# EAGLE board RC2014 Real-Time Clock and IO (EAGLE 7.1.0)
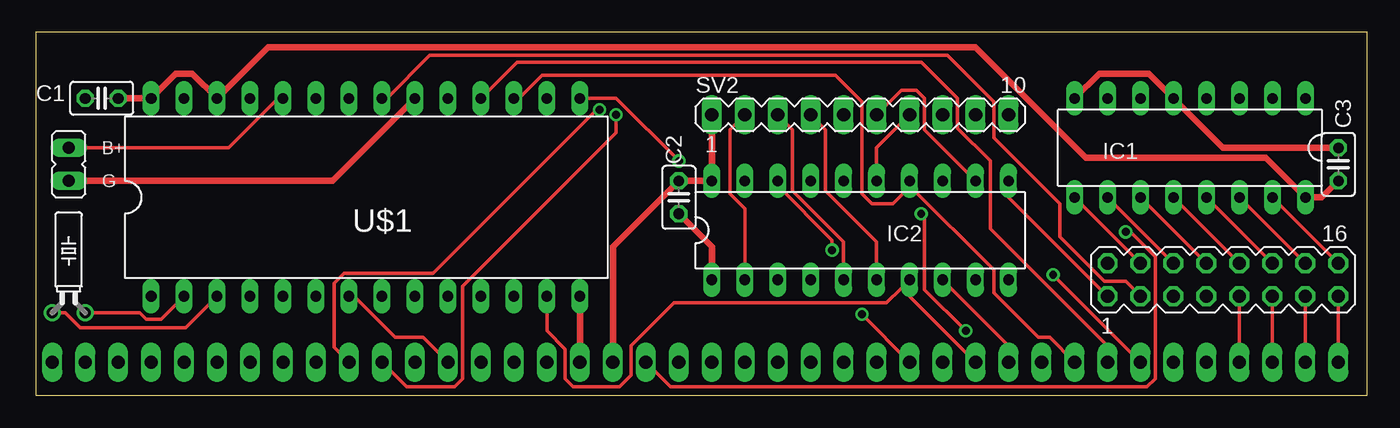
[diagram p0: board, top side]
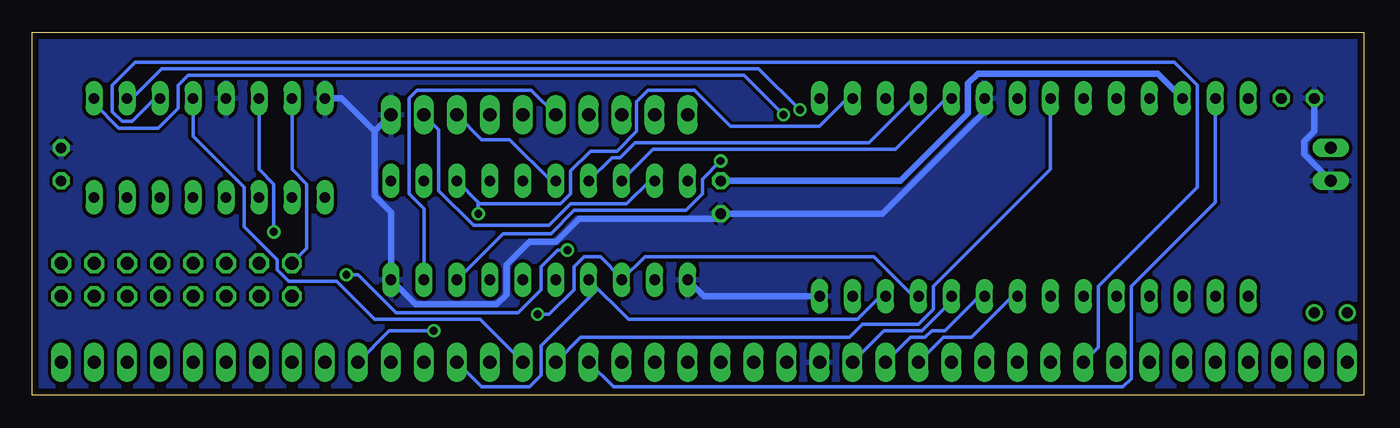
[diagram p1: board, bottom side, seen from below]

Size 102.54 x 27.93 mm. Coordinates in mm from the lower left corner, seen from the top.
Outline: 0,0 102.54,0 102.54,27.93 0,27.93 0,0
Copper layers (1*16): Top 0.035mm / dielectric 1.5mm / Bottom 0.035mm
Design rules "default *": minimum track width 10mil, minimum drill 24mil, track to track 10mil, track to pad 10mil, pad to pad 10mil, via to via 10mil, smd to smd 10mil, copper to edge 20mil, drill to drill 8mil, minimum pad ring 10mil, minimum via ring 8mil, stop-mask expansion 4mil, vias tented up to drill 25mil, thermal gap 10mil
Net classes: 1 PWR: width 0.508 mm

## Footprints (pad centres in the part's own frame; a part is rotated, then mirrored left to right if it is on the bottom)
C025-025X050 = drill 0.813 octagon: 1 -1.27,0; 2 1.27,0
DIL16 = drill 0.813 long: 1 -8.89,-3.81; 2 -6.35,-3.81; 3 -3.81,-3.81; 4 -1.27,-3.81; 5 1.27,-3.81; 6 3.81,-3.81; 7 6.35,-3.81; 8 8.89,-3.81; 9 8.89,3.81; 10 6.35,3.81; 11 3.81,3.81; 12 1.27,3.81; 13 -1.27,3.81; 14 -3.81,3.81; 15 -6.35,3.81; 16 -8.89,3.81
DIL20 = drill 0.813 long: 1 -11.43,-3.81; 2 -8.89,-3.81; 3 -6.35,-3.81; 4 -3.81,-3.81; 5 -1.27,-3.81; 6 1.27,-3.81; 7 3.81,-3.81; 8 6.35,-3.81; 9 8.89,-3.81; 10 11.43,-3.81; 11 11.43,3.81; 12 8.89,3.81; 13 6.35,3.81; 14 3.81,3.81; 15 1.27,3.81; 16 -1.27,3.81; 17 -3.81,3.81; 18 -6.35,3.81; 19 -8.89,3.81; 20 -11.43,3.81
JP1 = drill 0.914 long: 1 0,-1.27; 2 0,1.27
TC26H = drill 0.813: 1 -1.27,0; 2 1.27,0
MA08-2 = drill 1.016 octagon: 1 -8.89,-1.27; 2 -8.89,1.27; 3 -6.35,-1.27; 4 -6.35,1.27; 5 -3.81,-1.27; 6 -3.81,1.27; 7 -1.27,-1.27; 8 -1.27,1.27; 9 1.27,-1.27; 10 1.27,1.27; 11 3.81,-1.27; 12 3.81,1.27; 13 6.35,-1.27; 14 6.35,1.27; 15 8.89,-1.27; 16 8.89,1.27
MA10-1 = drill 1.016 long: 1 -11.43,0; 2 -8.89,0; 3 -6.35,0; 4 -3.81,0; 5 -1.27,0; 6 1.27,0; 7 3.81,0; 8 6.35,0; 9 8.89,0; 10 11.43,0
DIL28-6 = drill 0.813 long: 1 -16.51,-7.62; 2 -13.97,-7.62; 3 -11.43,-7.62; 4 -8.89,-7.62; 5 -6.35,-7.62; 6 -3.81,-7.62; 7 -1.27,-7.62; 8 1.27,-7.62; 9 3.81,-7.62; 10 6.35,-7.62; 11 8.89,-7.62; 12 11.43,-7.62; 13 13.97,-7.62; 14 16.51,-7.62; 15 16.51,7.62; 16 13.97,7.62; 17 11.43,7.62; 18 8.89,7.62; 19 6.35,7.62; 20 3.81,7.62; 21 1.27,7.62; 22 -1.27,7.62; 23 -3.81,7.62; 24 -6.35,7.62; 25 -8.89,7.62; 26 -11.43,7.62; 27 -13.97,7.62; 28 -16.51,7.62
SIP40 = drill 1.016 long: 1 -48.26,0; 2 -45.72,0; 3 -43.18,0; 4 -40.64,0; 5 -38.1,0; 6 -35.56,0; 7 -33.02,0; 8 -30.48,0; 9 -27.94,0; 10 -25.4,0; 11 -22.86,0; 12 -20.32,0; 13 -17.78,0; 14 -15.24,0; 15 -12.7,0; 16 -10.16,0; 17 -7.62,0; 18 -5.08,0; 19 -2.54,0; 20 0,0; 21 2.54,0; 22 5.08,0; 23 7.62,0; 24 10.16,0; 25 12.7,0; 26 15.24,0; 27 17.78,0; 28 20.32,0; 29 22.86,0; 30 25.4,0; 31 27.94,0; 32 30.48,0; 33 33.02,0; 34 35.56,0; 35 38.1,0; 36 40.64,0; 37 43.18,0; 38 45.72,0; 39 48.26,0; 40 50.8,0

## Placement (x,y rotation side)
C1  [C025-025X050]  5.08,22.86 180 top
C2  [C025-025X050]  49.53,15.24 270 top
C3  [C025-025X050]  100.33,17.78 90 top
IC1  74HC138N  [DIL16]  88.9,19.05 180 top
IC2  74LS374N  [DIL20]  63.5,12.7 0 top
JP1  [JP1]  2.54,17.78 180 top
Q1  [TC26H]  2.54,6.35 0 top
SV1  [MA08-2]  91.44,8.89 0 top
SV2  [MA10-1]  63.5,21.59 0 top
U$1  BQ4845  [DIL28-6]  25.4,15.24 0 top
U$2  RC2014  [SIP40]  49.53,2.54 0 top

## Library data of the parts
C1-C3 = resistor
IC1 IC2 = 74xx-eu
JP1 = jumper
Q1 = crystal; OC_FARNELL: unknown; OC_NEWARK: unknown
SV1 SV2 = con-lstb; OC_FARNELL: unknown; OC_NEWARK: unknown
U$1 U$2 = scott

## Nets
+5V [PWR]: C1.1 C2.1 C3.1 IC1.16 IC2.20 SV2.1 U$1.26 U$1.28 U$2.18
A5: IC1.1 U$2.11
A6: IC1.2 U$2.10
A7: IC1.3 U$2.9
D0: IC2.3 U$1.11 U$2.27
D1: IC2.4 U$1.12 U$2.28
D2: IC2.7 U$1.13 U$2.29
D3: IC2.8 U$1.15 U$2.30
D4: IC2.13 U$1.16 U$2.31
D5: IC2.14 U$1.17 U$2.32
D6: IC2.17 U$1.18 U$2.33
D7: IC2.18 U$1.19 U$2.34
GND [PWR]: C1.2 C2.2 C3.2 IC1.5 IC1.8 IC2.1 IC2.10 JP1.2 SV2.10 U$1.14 U$1.20 U$2.17
N$1: IC2.2 SV2.2
N$2: IC2.5 SV2.3
N$3: IC2.6 SV2.4
N$4: IC2.9 SV2.5
N$5: IC2.12 SV2.6
N$6: IC2.15 SV2.7
N$7: IC2.16 SV2.8
N$8: IC2.19 SV2.9
N$9: SV1.9 U$2.37
N$10: JP1.1 U$1.24
N$11: SV1.11 U$2.38
N$12: SV1.13 U$2.39
N$13: U$1.10 U$2.16
N$14: U$1.9 U$2.15
N$15: U$1.8 U$2.14
N$16: U$1.7 U$2.13
N$17: U$1.27 U$2.24
N$18: U$1.22 U$2.25
N$19: IC1.4 U$2.26
N$20: SV1.15 U$2.40
N$21: SV1.3 U$1.21
N$22: IC1.15 SV1.16
N$23: IC1.14 SV1.14
N$24: IC1.13 SV1.12
N$25: IC1.12 SV1.10
N$26: IC1.11 SV1.8
N$27: IC1.10 SV1.6
N$28: IC1.9 SV1.4
N$29: IC1.7 SV1.2
N$30: Q1.2 U$1.2
N$31: Q1.1 U$1.3
N$32: IC2.11 SV1.1
N$33: IC1.6 U$2.19

## Tracks (layer width: path | path; a pad name or v marks a point on that pad's centre or on a via)
+5V
  Top 0.508: U$2.18 44.45,11.43 C2.1 IC2.20 SV2.1 | C3.1 99.06,15.24 IC1.16 94.74,18.29 80.9,18.29 72.39,26.8 17.91,26.8 U$1.26 12.06,24.77 10.79,24.77 U$1.28 C1.1
  Bottom 0.508: C2.1 35.69,16.51 30.48,21.72 30.48,24 29.72,24.77 15.88,24.77 U$1.26
A5  (via drill 0.61)
  Top 0.254: v44.7,21.59 44.7,20.19 32.89,8.38 32.89,1.27 32.26,0.64 28.57,0.64 U$2.11
  Bottom 0.254: IC1.1 97.79,22.48 95.89,20.57 92.84,20.57 91.31,22.1 91.31,23.88 90.55,24.64 47.75,24.64 v44.7,21.59
A6  (via drill 0.61)
  Top 0.254: v43.43,21.97 43.18,21.97 30.61,9.4 23.75,9.4 22.99,8.64 22.99,3.68 U$2.10
  Bottom 0.254: IC1.2 94.87,22.86 92.58,25.15 46.61,25.15 v43.43,21.97
A7
  Bottom 0.254: IC1.3 93.09,22.86 94.87,21.08 95.63,21.08 96.39,21.84 96.39,23.88 94.61,25.65 14.61,25.65 12.83,23.88 12.83,16 20.45,8.38 20.45,3.68 U$2.9
D0  (via drill 0.61)
  Top 0.254: v63.63,6.22 U$2.27
  Bottom 0.254: U$1.11 34.67,7.62 37.72,10.67 55.37,10.67 IC2.3 57.15,9.02 58.8,10.67 60.07,10.67 60.83,9.91 60.83,8.13 62.74,6.22 v63.63,6.22
D1
  Bottom 0.254: U$1.12 37.21,7.62 38.99,5.84 56.64,5.84 IC2.4 59.05,8.13 63.37,3.81 63.37,1.52 64.26,0.64 67.94,0.64 U$2.28
D2
  Top 0.254: U$1.13 39.37,4.95 40.77,3.56 40.77,1.27 41.4,0.64 44.96,0.64 45.85,1.52 45.85,3.81 49.15,7.11 65.53,7.11 66.67,8.26 | 66.67,8.26 U$2.29 | 66.67,8.26 IC2.7
D3  (via drill 0.61)
  Top 0.254: U$1.15 44.7,22.86 v49.53,18.03 | U$2.30 74.93,3.81 IC2.8
  Bottom 0.254: v49.53,18.03 50.93,16.64 50.93,15.49 52.2,14.22 60.83,14.22 62.61,12.45 66.29,12.45 IC2.8
D4  (via drill 0.61)
  Top 0.254: v71.63,4.95 68.45,8.13 68.45,13.72 v68.2,13.97
  Bottom 0.254: U$1.16 39.75,22.86 41.91,20.7 48.77,20.7 51.56,23.5 55.12,23.5 56.01,22.61 56.01,20.32 57.53,18.8 59.56,18.8 61.09,17.27 61.09,15.49 61.85,14.73 68.07,14.73 68.14,14.8 | IC2.13 68.14,14.8 | U$2.31 75.06,4.95 v71.63,4.95 | v68.2,13.97 68.2,14.73 68.14,14.8
D5
  Top 0.254: U$2.32 78.11,4.45 77.22,4.45 73.79,7.87 73.79,9.65 67.31,16.13 IC2.14 67.31,16 66.04,14.73 64.39,14.73 63.63,15.49 63.63,22.61 61.59,24.64 38.99,24.64 37.21,22.86 U$1.17
D6
  Top 0.254: U$2.33 82.55,3.81 73.53,12.83 73.53,18.03 70.99,20.57 70.99,22.86 68.2,25.65 37.08,25.65 U$1.18
  Bottom 0.254: U$1.18 34.67,22.86 38.1,19.43 56.13,19.43 57.28,18.29 57.91,18.29 IC2.17
D7  (via drill 0.61)
  Top 0.254: v78.36,9.27 U$2.34 | v61.34,11.18 61.34,11.94 57.15,16.13 IC2.18
  Bottom 0.254: U$1.19 32.13,22.86 36.07,18.92 54.74,18.92 IC2.18 | v78.36,9.27 77.47,9.27 74.55,6.35 65.15,6.35 63.37,8.13 63.37,9.91 62.1,11.18 v61.34,11.18
GND
  Top 0.508: IC1.8 81.92,24.77 85.72,24.77 IC1.5 91.44,19.05 C3.2 | U$2.17 U$1.14 | IC2.1 52.07,11.43 C2.2 | JP1.2 22.86,16.51 U$1.20
  Bottom 0.508: 76.2,20.32 76.2,15.37 74.93,14.1 IC2.10 73.03,6.99 66.8,6.99 66.04,7.75 66.04,10.03 64.26,11.81 62.23,11.81 60.45,13.59 49.91,13.59 C2.2 37.08,13.97 29.21,21.84 U$1.20 | SV2.10 76.2,20.32 | IC1.8 78.74,22.86 76.2,20.32 | C1.2 3.81,20.32 4.57,19.56 4.57,18.54 JP1.2 | U$1.14 50.8,7.62 IC2.1
  pour Bottom: 0,0 0,27.94 102.87,27.94 102.87,0
N$1
  Top 0.254: IC2.2 54.61,14.35 53.47,15.49 53.47,20.45 SV2.2
N$2
  Top 0.254: IC2.5 62.23,11.81 58.29,15.75 58.29,20.45 SV2.3
N$3
  Top 0.254: IC2.6 64.77,11.81 60.83,15.75 60.83,20.45 SV2.4
N$4
  Bottom 0.254: IC2.9 72.39,14.35 73.53,15.49 73.53,22.86 72.9,23.5 64.14,23.5 SV2.5
N$5
  Top 0.254: IC2.12 68.45,20.45 68.45,22.86 67.82,23.5 66.67,23.5 SV2.6
N$6
  Top 0.254: IC2.15 64.77,19.05 SV2.7
N$7
  Bottom 0.254: IC2.16 62.61,16.51 65.79,19.68 67.94,19.68 SV2.8
N$8
  Bottom 0.254: IC2.19 54.99,16.51 56.77,14.73 61.09,14.73 62.74,13.08 68.58,13.08 71.25,15.75 71.25,20.45 SV2.9
N$9
  Top 0.254: SV1.9 U$2.37
N$10
  Top 0.254: U$1.24 18.67,22.86 14.86,19.05 JP1.1
N$11
  Top 0.254: SV1.11 U$2.38
N$12
  Top 0.254: SV1.13 U$2.39
N$13
  Bottom 0.254: U$1.10 31.75,7.24 34.04,4.95 36.96,4.95 U$2.16
N$14
  Bottom 0.254: U$1.9 29.59,7.62 32.26,4.95 33.27,4.95 33.78,4.45 34.92,4.45 U$2.15
N$15
  Bottom 0.254: U$1.8 27.05,7.62 30.23,4.45 32.38,4.45 U$2.14
N$16
  Top 0.254: U$1.7 24.51,7.62 27.69,4.45 29.84,4.45 U$2.13
N$17
  Bottom 0.254: U$1.27 11.43,14.86 17.91,8.38 17.91,1.27 18.54,0.64 57.78,0.64 U$2.24
N$18
  Bottom 0.254: U$1.22 24.13,17.4 33.15,8.38 33.15,6.6 34.29,5.46 38.61,5.46 39.62,4.45 60.33,4.45 U$2.25
N$19
  Bottom 0.254: IC1.4 90.17,19.94 86.23,16 86.23,12.95 83.69,10.41 83.69,9.65 82.8,8.76 79.12,8.76 76.2,5.84 68.07,5.84 U$2.26
N$20
  Top 0.254: SV1.15 U$2.40
N$21
  Top 0.254: U$1.21 27.05,22.86 30.35,26.16 70.23,26.16 73.79,22.61 73.79,19.81 78.87,14.73 78.87,12.19 82.3,8.76 83.95,8.76 SV1.3
N$22
  Top 0.254: SV1.16 IC1.15
N$23
  Top 0.254: SV1.14 IC1.14
N$24
  Top 0.254: SV1.12 IC1.13
N$25
  Top 0.254: SV1.10 IC1.12
N$26
  Top 0.254: SV1.8 IC1.11
N$27
  Top 0.254: SV1.6 IC1.10
N$28
  Top 0.254: SV1.4 IC1.9
N$29
  Bottom 0.254: IC1.7 82.55,17.4 81.41,16.26 81.41,11.3 SV1.2
N$30
  Top 0.254: Q1.2 8,6.35 8.51,5.84 9.65,5.84 U$1.2
N$31
  Top 0.254: Q1.1 2.29,6.35 3.43,5.21 11.56,5.21 U$1.3
N$32
  Top 0.254: IC2.11 74.93,15.24 SV1.1
N$33  (via drill 0.61)
  Top 0.254: v83.95,12.57 84.33,12.57 86.23,10.67 86.23,1.27 85.6,0.64 48.9,0.64 U$2.19
  Bottom 0.254: IC1.6 85.09,17.4 83.95,16.26 v83.95,12.57

## Text on the board
tPlace: B+ | G